# Altium PCB Street_light_driver_hv2.PcbDoc
Units mm, origin at the board's own origin, x right, y up, seen from the top; angles counter-clockwise.
Board outline 50 x 124 mm, 2 copper layers (Top Layer, Bottom Layer); 49 components, 24 nets, 131 pads, 0 vias.
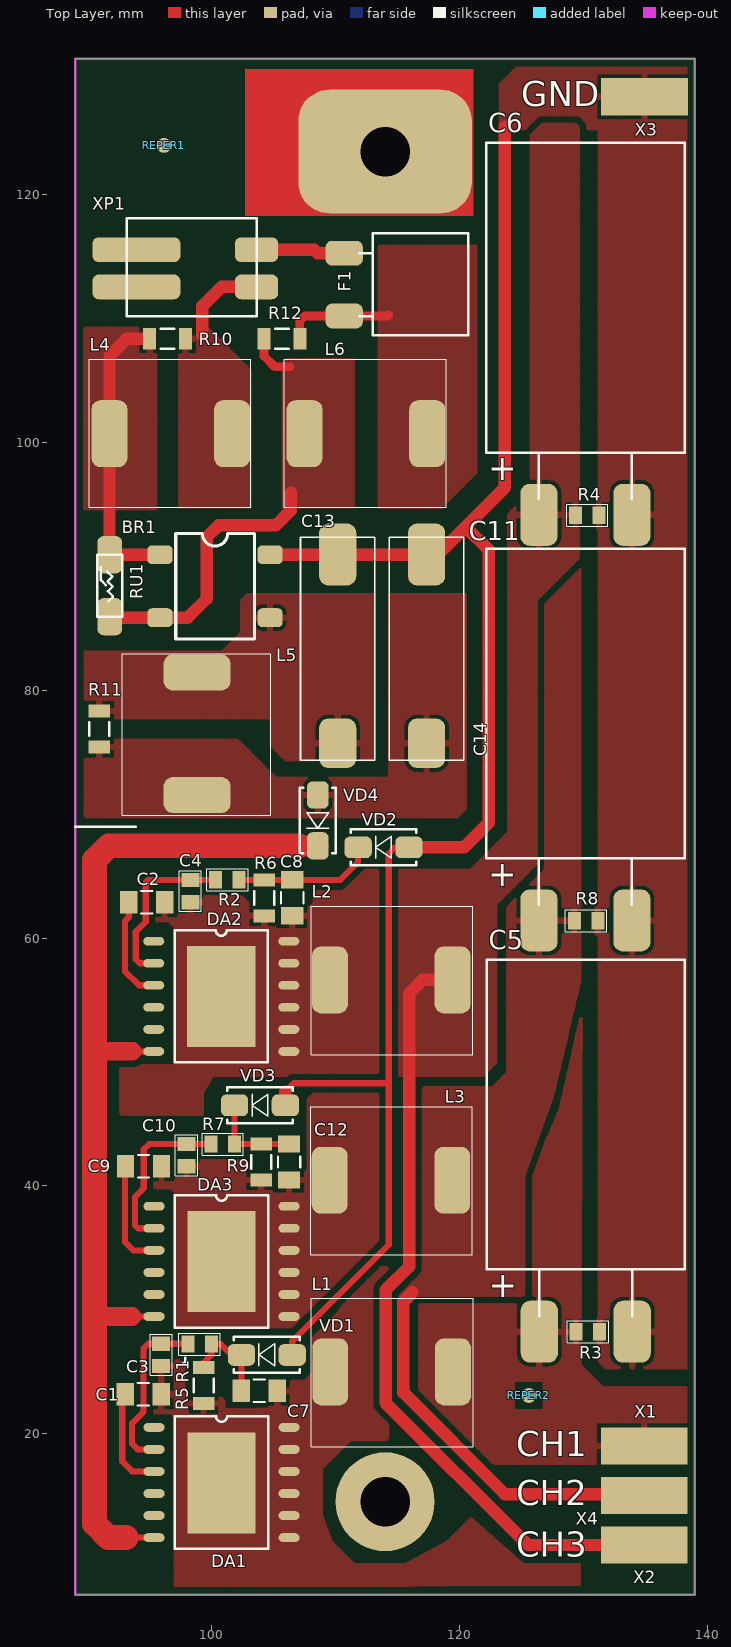
[diagram p0: Top Layer view]
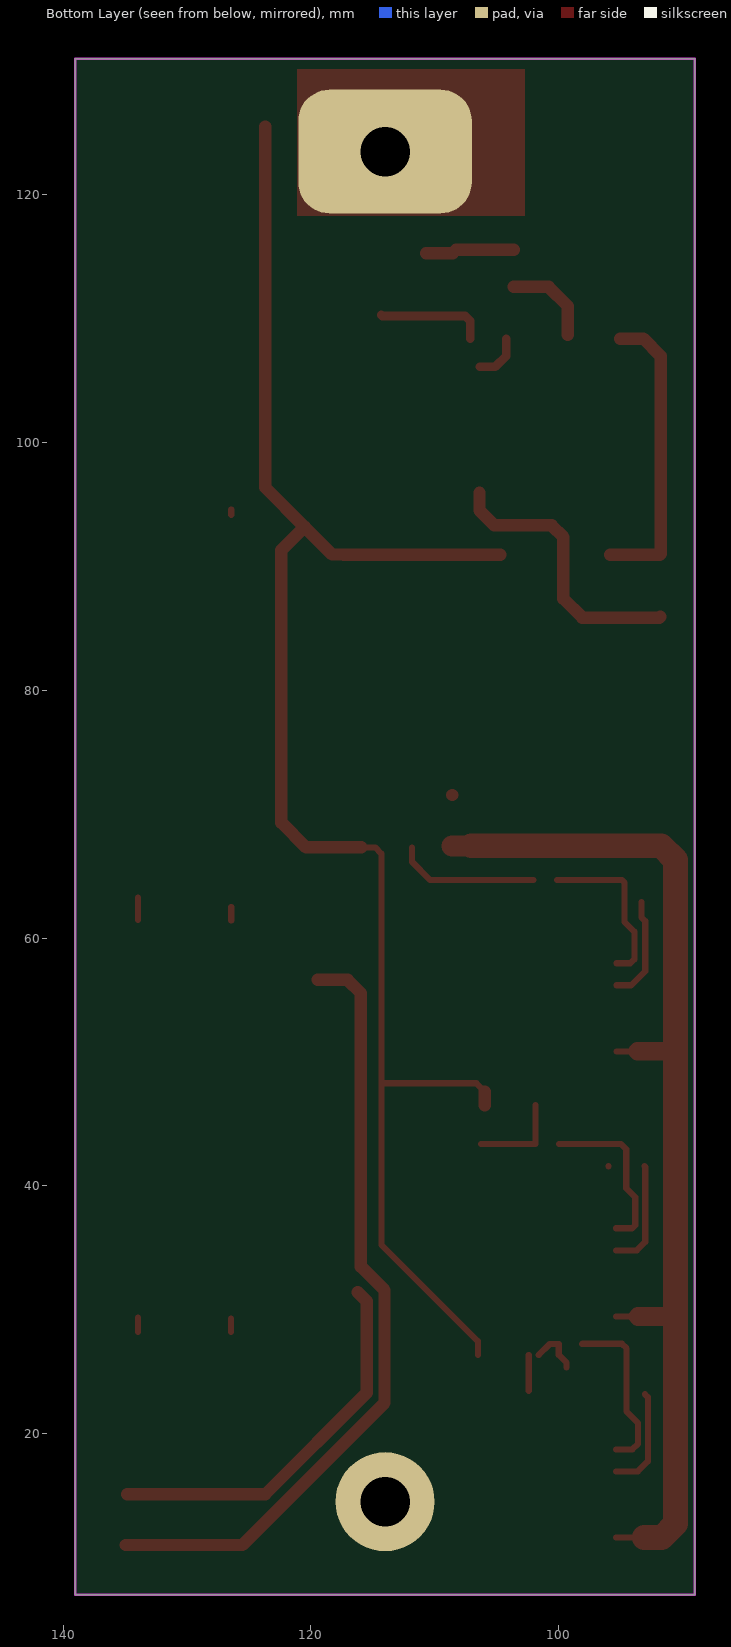
[diagram p1: Bottom Layer view, seen from below]

## Layer stack, top to bottom
Top Solder: solder mask 0.0102, Solder Resist, Dk 3.5
Top Layer: signal copper 0.0356
Dielectric 1: dielectric 0.32, FR-4, Dk 4.8
Bottom Layer: signal copper 0.0356
Bottom Solder: solder mask 0.0102, Solder Resist, Dk 3.5

## Board outline
89,7 89,131 139,131 139,7

## Design rules (kind name [scope] priority, off if disabled: settings)
Clearance Clearance_1 [InPolygon] p1: gap=0.5
Clearance [All] p2: gap=0.3
PolygonConnect PolygonConnect_2 [InComponent('DA1') OR InComponent('DA2') OR InComponent('DA3')] p1: connectstyle=Direct reliefconductorwidth=0.254 reliefentries=4 polygonreliefangle="90 Angle" airgapwidth=0.254
PolygonConnect PolygonConnect_1 [InComponent('L1') OR InComponent('L2') OR InComponent('L3') OR InComponent('L4') OR InComponent('L5') OR InComponent('L6')] p2: connectstyle=Direct reliefconductorwidth=2 reliefentries=4 polygonreliefangle="90 Angle" airgapwidth=0.3
PolygonConnect [All] p3: connectstyle=Relief reliefconductorwidth=0.5 reliefentries=4 polygonreliefangle="90 Angle" airgapwidth=0.3
RoutingVias [All] p1: holewidth=0.711 width=1.27 viastyle="Through Hole" minholewidth=0.711 minwidth=1.27 maxholewidth=0.711 maxwidth=1.27
SolderMaskExpansion [All] p1: expansion=0.102
Width [All] p1: maxlimit=3 minlimit=0.2 preferedwidth=0.5
30 further rules are at their usual default settings.

## Classes and differential pairs
component class Main: BR1 C13 C14 F1 L4 L5 L6 R10 R11 R12 REPER1 REPER2 RU1 VD4 XP1
component class ICS: C1 C2 C3 C4 C5 C6 C7 C8 C9 C10 C11 C12 DA1 DA2 DA3 L1 L2 L3 R1 R2 R3 R4 R5 R6 R7 R8 R9 VD1 VD2 VD3 X1 X2 X3 X4

## Components (designator, comment, footprint, x,y, rotation, side; value= is the part's Value field where it differs from the comment)
BR1 "DF10S" SDIP 95.825,90.95 r90 top
C1 "10uF" CC1206 94.475,23.175 r180 top
C2 "10uF" CC1206 94.75,62.9 r180 top
C3 "1uF" CC0805 95.925,26.35 r270 top
C4 "1uF" CC0805 98.275,63.8 r270 top
C5 "470uFx100V" CAP_7.5_SMD_2 130.5,45.95 r0 top
C6 "470uFx100V" CAP_7.5_SMD_2 130.475,111.9 r0 top
C7 "10uF" CC1206 103.85,23.45 r0 top
C8 "10uF" CC1206 106.5,63.25 r270 top
C9 "10uF" CC1206 94.5,41.575 r180 top
C10 "1uF" CC0805 97.975,42.475 r270 top
C11 "470uFx100V" CAP_7.5_SMD_2 130.475,79.15 r0 top
C12 "10uF" CC1206 106.25,41.925 r270 top
C13 "100nFx630V" CAP_630V_SMD 110.1,83.55 r270 top
C14 "100nFx630V" CAP_630V_SMD 117.275,83.55 r270 top
DA1 "LNK460KG" eSOP-12 101.025,15.95 r0 top
DA2 "LNK460KG" eSOP-12 101,55.2 r0 top
DA3 "LNK460KG" eSOP-12 101.025,33.8 r0 top
F1 "*" "Fuse Belfuse" 110.675,112.85 r270 top
L1 "CDRH129" IND_CDRH129 115.15,25.125 r270 top
L2 "CDRH129" IND_CDRH129 115.125,56.775 r270 top
L3 "CDRH129" IND_CDRH129 115.1,40.6 r270 top
L4 "CDRH129" IND_CDRH129 96.075,100.575 r90 top
L5 "CDRH129" IND_CDRH129 98.975,75.875 r180 top
L6 "CDRH129" IND_CDRH129 111.825,100.575 r90 top
R1 "3k3" RC0805 99.025,27.225 r0 top
R2 "3k3" RC0805 101.275,64.7 r0 top
R3 "100k" RC0805 130.375,28.225 r180 top
R4 "100k" RC0805 130.325,94.15 r180 top
R5 "1E2" RC1206 99.35,23.875 r270 top
R6 "1E2" RC1206 104.25,63.25 r270 top
R7 "3k3" RC0805 100.9,43.375 r0 top
R8 "100k" RC0805 130.225,61.4 r180 top
R9 "1E2" RC1206 104,41.925 r270 top
R10 "3k3" RC1206 96.45,108.4 r180 top
R11 "3k6" RC1206 90.925,76.875 r270 top
R12 "3k3" RC1206 105.675,108.4 r180 top
REPER1 "REPER1.2" REPER1.2 96.15,124 r90 top
REPER2 "REPER1.2" REPER1.2 125.6,23.075 r90 top
RU1 "KLS6-07D" Varistor_7mm_SMD 91.85,88.325 r180 top
VD1 "ES1J" SMA 104.45,26.35 r180 top
VD2 "ES1J" SMA 113.875,67.325 r180 top
VD3 "ES1J" SMA 103.9,46.5 r180 top
VD4 "ES1J" SMA 108.575,69.5 r270 top
X1 "PIN_7x3mm_SMD" PIN_7x3mm_SMD 134.925,19 r0 top
X2 "PIN_7x3mm_SMD" PIN_7x3mm_SMD 134.925,11 r0 top
X3 "PIN_7x3mm_SMD" PIN_7x3mm_SMD 134.95,127.925 r0 top
X4 "PIN_7x3mm_SMD" PIN_7x3mm_SMD 134.925,15 r0 top
XP1 "*" "Poke-In 2pin" 93.925,115.575 r0 top

## Footprints (in the part's own frame and the unit in brackets; to place one, negate y for a bottom-side part, rotate by r counter-clockwise, add the part's x,y. Pads: shape width x height; smd on the part's side, far side on the other; paste and mask are expansions set on the pad)
CAP_7.5_SMD_2 [mm]
  rrect50% 3x5 smd: 1(3.45,-17.725) 2(-4.05,-17.725)
  silkscreen extent -8.3,-16.47 7.7,12.3
CAP_630V_SMD [mm]
  rrect50% 5x3 smd: 1(-7.42,0.075)
  rrect50% 4x3 smd: 2(7.82,0.075)
  silkscreen extent -8.8,-2.92 9.2,3.08
CC0805 [mm]
  rect 1.15x1.45 smd paste-25.4: 1(-0.9,0) 2(0.9,0)
  silkscreen extent -1.65,-0.9 1.65,0.9
CC1206 [mm]
  rect 1.4x1.8 smd paste-25.4: 1(-1.45,0) 2(1.45,0)
  silkscreen extent -0.45,-0.9 0.45,0.9
eSOP-12 [mm]
  oval 1.7x0.71 smd: 1(-5.675,4.55) 2(-5.675,2.77) 3(-5.675,0.99) 4(-5.675,-0.79) 5(-5.675,-2.57) 6(-5.675,-4.35) 7(5.225,-4.35) 8(5.225,-2.57) 9(5.225,-0.79) 10(5.225,0.99) 11(5.225,2.77) 12(5.225,4.55)
  rect 5.51x8.15 smd: 13(-0.225,0.075)
  silkscreen extent -3.99,-5.24 3.54,5.44, body extent -4,-5.25 3.52,5.45, height 2.3
"Fuse Belfuse" [mm]
  rrect50% 2x3 smd: 1(-2.45,0.025) 2(2.63,0.025)
  silkscreen extent -4.08,1.25 4.18,10.02
IND_CDRH129 [mm]
  rrect50% 5.4x2.9 smd: 1(0.15,-5.575) 2(0.15,4.325)
  silkscreen extent -5.8,-7.1 6.17,5.95
PIN_7x3mm_SMD [mm]
  rect 7x3 smd: 1(0,0)
"Poke-In 2pin" [mm]
  rrect50% 7.1x2 smd: 1(0,0) 2(0,-3)
  rrect50% 3.5x2 smd: 3(9.7,-3) 4(9.7,0)
  silkscreen extent -0.77,-5.38 9.72,2.53
RC0805 [mm]
  rect 1.05x1.4 smd paste-25.4: 1(-0.95,0) 2(0.95,0)
  silkscreen extent -1.67,-0.89 1.67,0.89
RC1206 [mm]
  rect 1.05x1.75 smd paste-25.4: 1(-1.45,0) 2(1.45,0)
  silkscreen extent -0.55,-0.8 0.55,0.8
REPER1.2 [mm]
  round 1.2 smd paste-25.4 mask-25.4: 1(0,0)
  Top Layer pour cut-out: -1.2,-1.2 1.2,-1.2 1.2,1.2 -1.2,1.2
SDIP [mil]
  rrect50% 60x80 smd: 1(0,0) 2(-200,0) 3(-200,-350) 4(0,-350)
  silkscreen extent -268,-300 68,-50
SMA [mm]
  rrect50% 2.2x1.75 smd: 1(-2.05,0) 2(2.05,0)
  silkscreen extent -2.65,-1.45 2.65,1.45
Varistor_7mm_SMD [mm]
  rrect50% 2x3 smd: 1(0.075,2.375) 2(0.075,-2.625)
  silkscreen extent -0.95,-2.63 1.1,2.37

## Part data
C1 C2 C7 C8 C9 C12: library part CC1206, "CC1206"
C3 C4 C10: library part CC0805, "CC0805"
C5 C6 C11: library part CAP_16x25
C13 C14: library part Cap_HV
F1: library part "Fuse Belufse"
R1 R2 R3 R4 R7 R8: library part RC0805, "RC0805"
R5 R6 R9 R10 R11 R12: library part RC1206, "RC1206"
VD1 VD2 VD3 VD4: library part SS14, "Schottky Rectifier"
XP1: library part "Poke-IN 2Pin"

## Free pads (board coordinates)
  round 8 hole 4: 0(114,14.5)
  rrect50% 14x10 hole 4: 0(114,123.5)

## Nets (pads, with @x,y where several pads share a name; then routed paths per layer and width w, separated by ;. In a path a pad name is that pad's centre, name@x,y a point inside that pad or via, vN(x,y) a via of type N, cw(c..) or ccw(c..) an arc to the next point about the centre after c; other vN are vias at no path point)
GND: BR1.4 C5.1 C6.1 C11.1 C13.1 C14.1 R3.1 R4.1 R8.1 VD1.1 VD2.1 VD3.1 X3.1 | length 140.5
  Top Layer w0.5: 105.95,47.6 106.625,48.275 114.275,48.275 ; VD1.1 106.5,27.45 114.3,35.25 114.3,66.825 114.8,67.325 VD2.1 ; C5.1 C5.1@133.95,29.375 ; C11.1@133.95,61.45 C11.1@133.95,63.275
  Top Layer w1: BR1.4 117.33,90.95 C14.1 118.27,90.97 120.5,93.2 ; VD3.1 105.95,47.6 ; VD2.1 120.375,67.325 122.375,69.325 122.375,91.325 120.5,93.2 ; 123.675,125.525 123.675,96.375 120.5,93.2
NetBR1_1: BR1.1 L4.2 R10.2 RU1.2 | length 23.9
  Top Layer w1: R10.2 93.15,108.4 91.75,107 L4.2 91.75,91.025 91.825,90.95 BR1.1
NetBR1_2: BR1.2 L6.2 R12.2 RU1.1 | length 26.4
  Top Layer w0.7: R12.2 104.225,107 105.1,106.125 106.35,106.125
  Top Layer w1: RU1.1 91.855,85.87 BR1.2 98.07,85.87 99.6,87.4 99.6,92.375 100.55,93.325 105.175,93.325 106.375,94.525 106.375,95.95
NetBR1_3: BR1.3 C13.2 L5.1 R11.1
NetC1_1: C1.1 C3.2 C7.2 DA1.7 DA1.8 DA1.9 DA1.10 DA1.11 DA1.12 DA1.13 L1.1 R5.2
NetC1_2: C1.2 DA1.3 | length 8.4
  Top Layer w0.5: C1.2 92.775,22.925 92.775,17.75 93.585,16.94 DA1.3
NetC2_1: C2.1 C4.2 C8.2 DA2.7 DA2.8 DA2.9 DA2.10 DA2.11 DA2.12 DA2.13 L2.1 R6.2
NetC2_2: C2.2 DA2.3 | length 8.5
  Top Layer w0.5: C2.2 93.3,61.675 93,61.375 93,57.325 94.135,56.19 DA2.3
NetC3_1: C3.1 DA1.2 R1.1 | length 13.8
  Top Layer w0.5: DA1.2 94.03,18.72 93.575,19.175 93.575,20.85 94.5,21.775 94.5,26.875 94.875,27.25 C3.1 98.05,27.25 R1.1
NetC4_1: C4.1 DA2.2 R2.1 | length 13.7
  Top Layer w0.5: DA2.2 94.205,57.97 93.875,58.3 93.875,60.525 94.675,61.325 94.675,64.5 94.875,64.7 98.125,64.7 R2.1@100.125,64.7
NetC5_2: C5.2 L1.2 R3.2 X1.1 | length 1.1
  Top Layer w0.5: C5.2 C5.2@126.45,29.3
NetC6_2: C6.2 L2.2 R4.2 X2.1 | length 63.9
  Top Layer w0.5: C6.2 C6.2@126.425,94.6
  Top Layer w1: L2.2 117.025,56.625 115.95,55.55 115.95,33.475 114.05,31.575 114.05,22.475 125.525,11 X2.1
NetC7_1: C7.1 R1.2 R5.1 VD1.2 | length 7
  Top Layer w0.5: R5.1 99.35,25.725 99.975,26.35 R1.2 100.725,27.225 VD1.2@101.6,26.35 ; C7.1 VD1.2
NetC8_1: C8.1 R2.2 R6.1 VD2.2 | length 11.6
  Top Layer w0.5: R2.2@102.025,64.7 104,64.7 106.225,64.7 110.375,64.7 111.825,66.15 VD2.2
NetC9_1: C9.1 C10.2 C12.2 DA3.7 DA3.8 DA3.9 DA3.10 DA3.11 DA3.12 DA3.13 L3.1 R9.2 | length 0
NetC9_2: C9.2 DA3.3 | length 8.8
  Top Layer w0.5: C9.2 93,41.525 93,35.475 93.685,34.79 DA3.3
NetC10_1: C10.1 DA3.2 R7.1 | length 13.7
  Top Layer w0.5: DA3.2 94.055,36.57 93.8,36.825 93.8,39.075 94.525,39.8 94.525,42.95 94.95,43.375 C10.1 R7.1
NetC11_2: C11.2 L3.2 R8.2 X4.1 | length 32.2
  Top Layer w0.5: C11.2 C11.2@126.425,62.5
  Top Layer w1: 116.2,31.4 115.475,30.675 115.475,23.3 123.675,15.1 X4.1@134.825,15.1
NetC12_1: C12.1 R7.2 R9.1 VD3.2 | length 7.5
  Top Layer w0.5: VD3.2 R7.2 C12.1
NetC14_2: C14.2 L5.2 R11.2 VD4.1 | length 0
NetDA1_6: DA1.6 DA2.6 DA3.6 VD4.2 | length 86.7
  Top Layer w0.5: 93.075,11.6 DA1.6 ; 93.875,29.45 DA3.6 ; 93.975,50.85 DA2.6
  Top Layer w0.6: 90.55,51.275 90.975,50.85
  Top Layer w1: 93.55,29.45 93.875,29.45
  Top Layer w1.5: 90.55,29.5 90.6,29.45 93.55,29.45 ; 90.975,50.85 93.6,50.85
  Top Layer w1.7: 107.025,67.45 VD4.2
  Top Layer w2: 93.075,11.6 91.675,11.6 90.55,12.725 90.55,29.5 90.55,51.275 90.55,66.3 91.7,67.45 107.025,67.45
NetF1_1: F1.1 XP1.4 | length 7.2
  Top Layer w1: XP1.4 108.275,115.575 108.55,115.3 F1.1
NetF1_2: F1.2 L6.1 R12.1 | length 8.8
  Top Layer w0.7: R12.1 107.125,109.825 107.52,110.22 F1.2 114.22,110.22 114.3,110.3
NetL4_1: L4.1 R10.1 XP1.3 | length 7.3
  Top Layer w1: 99.25,108.7 99.25,111.025 100.8,112.575 XP1.3
pads on no net: DA1.1 DA1.4 DA1.5 DA2.1 DA2.4 DA2.5 DA3.1 DA3.4 DA3.5 REPER1.1 REPER2.1 XP1.1 XP1.2

## Polygon pours and split planes (outlines as drawn)
GND on Top Layer "GND_L01_P030" (hatched 90Degree grid 0.15 track 0.2, remove dead copper, pour order 30): 131.7,130.25 124.575,130.25 123.9,129.575 123.25,128.925 123.25,125.3 131.75,125.3 131.8,125.35
NetC5_2 on Top Layer "NETC5_2_L01_P028" (hatched 90Degree grid 0.15 track 0.2, remove dead copper, pour order 28): 116.775,30.925 125.25,30.925 125.65,31.325 125.775,31.45 125.775,40.875 126.207,41.722 126.4,42.45 127.25,44.175 128.1,46.175 129.3,51.45 129.875,55.7 129.775,25.525 131.35,23.95 131.575,23.725 138.325,23.725 138.325,17.65 138.375,17.6 138.35,17.575 128,17.575 121.525,17.575 117.3,21.8 116.95,22.15 116.775,22.15
NetC11_2 on Top Layer "NETC11_2_L01_P026" (hatched 90Degree grid 0.15 track 0.2, remove dead copper, pour order 26): 115.125,47.975 115.125,31.125 120.15,31.125 125.25,31.125 125.25,40.85 127.55,47.225 129.775,56.625 129.775,66.225 129.775,89.8 128.85,88.875 126.875,86.9 126.875,86 126.875,65.525 126.3,64.95 123.875,62.525 123.875,58.075 123.875,49.15 123,48.275 122.7,47.975
NetC1_1 on Top Layer "NETC1_1_L01_P024" (hatched 90Degree grid 0.15 track 0.2, remove dead copper, pour order 24): 97.025,17.475 97.025,21.075 97.025,21.325 96.725,21.625 95.25,21.625 95.25,26.025 96.75,26.025 97.275,26.025 97.525,25.775 97.8,25.5 97.8,24.5 97.8,23.15 98.075,22.875 99.025,22.875 100.8,22.875 101,22.675 101,22.275 101,22.125 101.125,22 101.875,22 104.5,22 104.7,22.2 104.7,23.15 104.7,24.275 107.225,24.275 107.525,24.275 108.175,24.925 108.175,27.35 108.175,27.75 108.875,28.45 110.275,29.85 112.3,33.425 114.25,33.425 114.25,21.15 114.25,19.625 114.075,19.45 111.775,19.45 111.175,19.45 110.65,18.925 108.9,17.175 108.9,15.875 108.9,13.4 109.675,11.275 111.488,9.462 115.65,9.462 119.025,11.275 120.925,13.175 125.15,9.462 129.725,9.462 129.725,7.787 120.062,7.787 108.9,7.625 97.025,7.625
NetC9_1 on Top Layer "NETC9_1_L01_P022" (hatched 90Degree grid 0.15 track 0.2, remove dead copper, pour order 22): 97.025,38.325 97.025,39.475 96.75,39.75 96.7,39.8 95.475,39.8 95.25,40.025 95.25,41.425 95.25,42.475 96.6,42.475 96.775,42.475 97.05,42.2 97.2,42.05 97.525,42.05 102.55,42.05 102.825,41.775 103.1,41.5 103.1,40.975 107.4,40.975 107.675,41.25 107.75,41.325 107.75,41.675 107.75,47 108.125,47.375 108.375,47.625 109.375,47.625 113.475,47.625 113.5,47.65 113.5,31.9 113.5,31.325 113.15,30.975 113.125,30.95 108.975,30.95 108.337,30.312 107.675,29.525 107.6,29.25 107.425,29 107.425,28.9 107.25,28.725 107.1,28.575 104.625,28.575 97.025,28.575
NetC6_2 on Top Layer "NETC6_2_L01_P020" (hatched 90Degree grid 0.15 track 0.2, remove dead copper, pour order 20): 115.125,65.525 120.925,65.525 123.55,68.15 123.925,68.525 123.925,71.6 123.925,94.225 125.45,95.75 125.775,96.075 125.775,101.6 125.775,124.825 126.675,125.725 126.7,125.75 129.375,125.75 129.625,125.5 129.625,91.3 129.625,90.675 127.975,89.025 126.25,87.3 126.25,83.075 126.25,66.025 124.25,64.025 122.975,62.75 122.975,59.35 122.975,49.95 121.9,48.875 115.125,48.875
NetC2_1 on Top Layer "NETC2_1_L01_P014" (hatched 90Degree grid 0.15 track 0.2, remove dead copper, pour order 14): 97,56.625 97,60.625 97,60.9 96.7,61.2 96.525,61.375 95.5,61.375 95.5,63.775 96.95,63.775 97.1,63.775 97.4,63.475 97.45,63.425 98.55,63.425 102.375,63.425 102.875,62.925 103.4,62.4 103.4,62.325 107.7,62.325 108.1,62.725 108.225,62.85 108.225,63.525 108.225,63.6 108.425,63.8 109.175,63.8 110.6,63.8 111.875,65.075 112.325,65.525 112.95,65.525 113.475,65.525 113.5,65.5 113.5,48.875 100.1,48.875 99.3,47.525 99.3,45.75 92.625,45.75 92.625,49.75 97,49.75
GND on Top Layer "GND_L01_P012" (hatched 90Degree grid 0.15 track 0.2, remove dead copper, pour order 12): 131.25,130.25 131.25,28.05 131.25,26.05 131.25,25.85 131.725,25.375 131.825,25.275 135.95,25.275 138.375,25.275 138.375,130.25
NetC14_2 on Top Layer "NETC14_2_L01_P010" (hatched 90Degree grid 0.15 track 0.2, remove dead copper, pour order 10): 89.75,76 89.75,69.75 95.025,69.75 119.85,69.75 120.5,70.4 120.5,75.05 120.5,87.75 114.35,87.75 114.35,72.975 114.325,72.95 105.65,72.95 105.15,72.95 103.725,74.375 103.625,74.475 102.1,76 96.275,76
NetBR1_3 on Top Layer "NETBR1_3_L01_P008" (hatched 90Degree grid 0.15 track 0.2, remove dead copper, pour order 8): 89.75,77.75 89.75,83.125 95.95,83.125 100.85,83.125 102.375,84.65 102.375,86.625 102.375,87.25 102.8,87.675 102.875,87.75 106.375,87.75 113.175,87.75 113.175,74.35 105.975,74.35 104.775,75.55 104.775,77.75
NetBR1_1 on Top Layer "NETBR1_1_L01_P006" (hatched 90Degree grid 0.15 track 0.2, remove dead copper, pour order 6): 95.525,109.275 89.65,109.275 89.625,109.25 89.625,94.625 95.525,94.625
NetL4_1 on Top Layer "NETL4_1_L01_P004" (hatched 90Degree grid 0.15 track 0.2, remove dead copper, pour order 4): 103.2,94.775 103.175,94.8 103.175,105.125 103.175,105.8 102.225,106.75 99.775,109.2 97.575,109.2 97.4,109.2 97.4,94.775
NetBR1_2 on Top Layer "NETBR1_2_L01_P002" (hatched 90Degree grid 0.15 track 0.2, remove dead copper, pour order 2): 105.75,100.45 105.75,106.25 105.75,106.4 106.125,106.775 106.15,106.75 108.6,106.75 111.5,106.75 111.475,106.725 111.475,94.775 105.75,94.775
NetF1_2 on Top Layer "NETF1_2_L01_P000" (hatched 90Degree grid 0.15 track 0.2, remove dead copper, pour order 0): 113.5,105.7 113.5,115.9 121.375,115.9 121.375,97.6 118.525,94.75 117.775,94.75 113.5,94.75

## Keep-outs
Keep-Out Layer:
  the board outline again, w0.2

## Other copper
Top Layer:
  rectangle: 102.7,118.3 121.125,130.15

## Silkscreen, mask and mechanical layers (free items; w line width, h text height)
Top Overlay:
  lines w0.2: 89,69 93.875,69 ; 97.712,25.663 97.875,25.825 97.875,26.125
  text "GND" at 125,127.175 h2
  text "CH1" at 124.6,18.15 h2
  text "CH2" at 124.6,14.225 h2
  text "CH3" at 124.6,10.075 h2
Top Solder:
  rectangle: 102.7,118.3 121.125,130.15

## Dimensions
139,131 to 139,7 on Mechanical 1
139,131 to 89,131 on Mechanical 1

## Text inside footprints (layer, text, board x,y; h text height)
C5: Top Overlay "+" at 122.375,31 h2
C6: Top Overlay "+" at 122.35,96.95 h2
C11: Top Overlay "+" at 122.35,64.2 h2